# Altium PCB RGB_led_controller_v2.0.PcbDoc
Units mm, origin at the board's own origin, x right, y up, seen from the top; angles counter-clockwise.
Board outline 78 x 50 mm, 2 copper layers (Top Layer, Bottom Layer), stack 1.5 mm thick; 20 components, 17 nets, 95 pads, 39 vias.
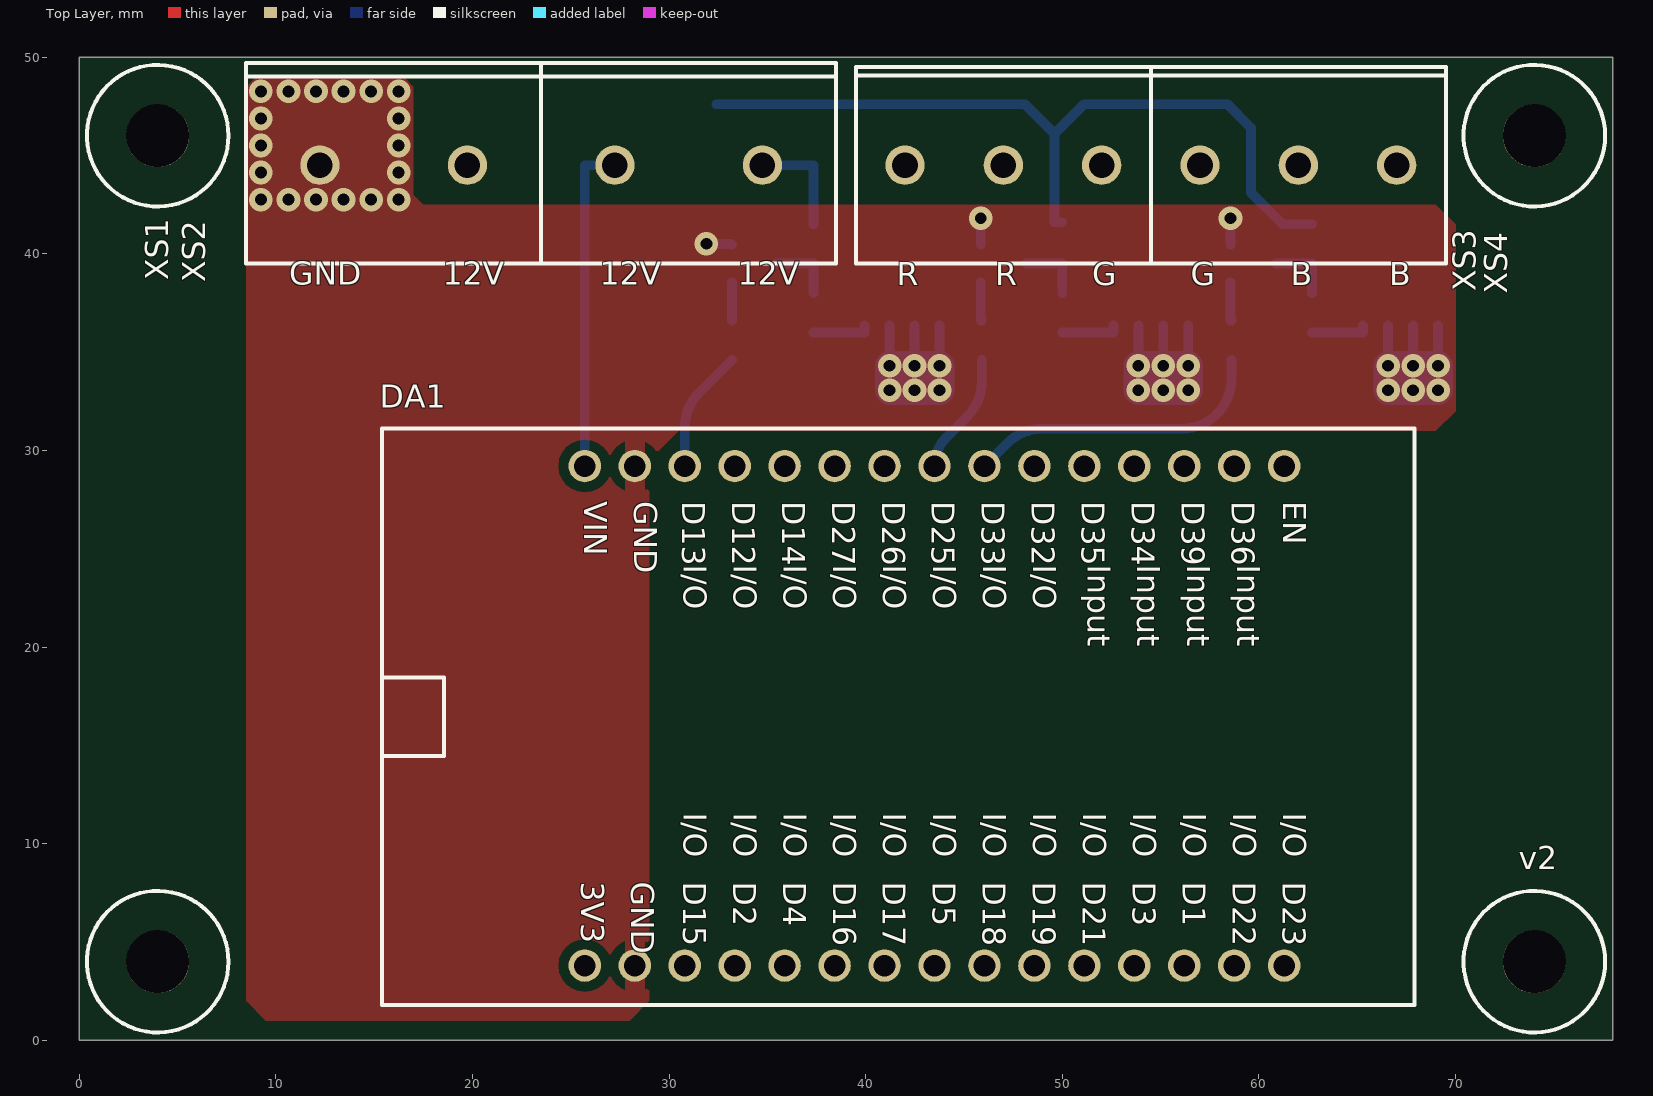
[diagram p0: Top Layer view]
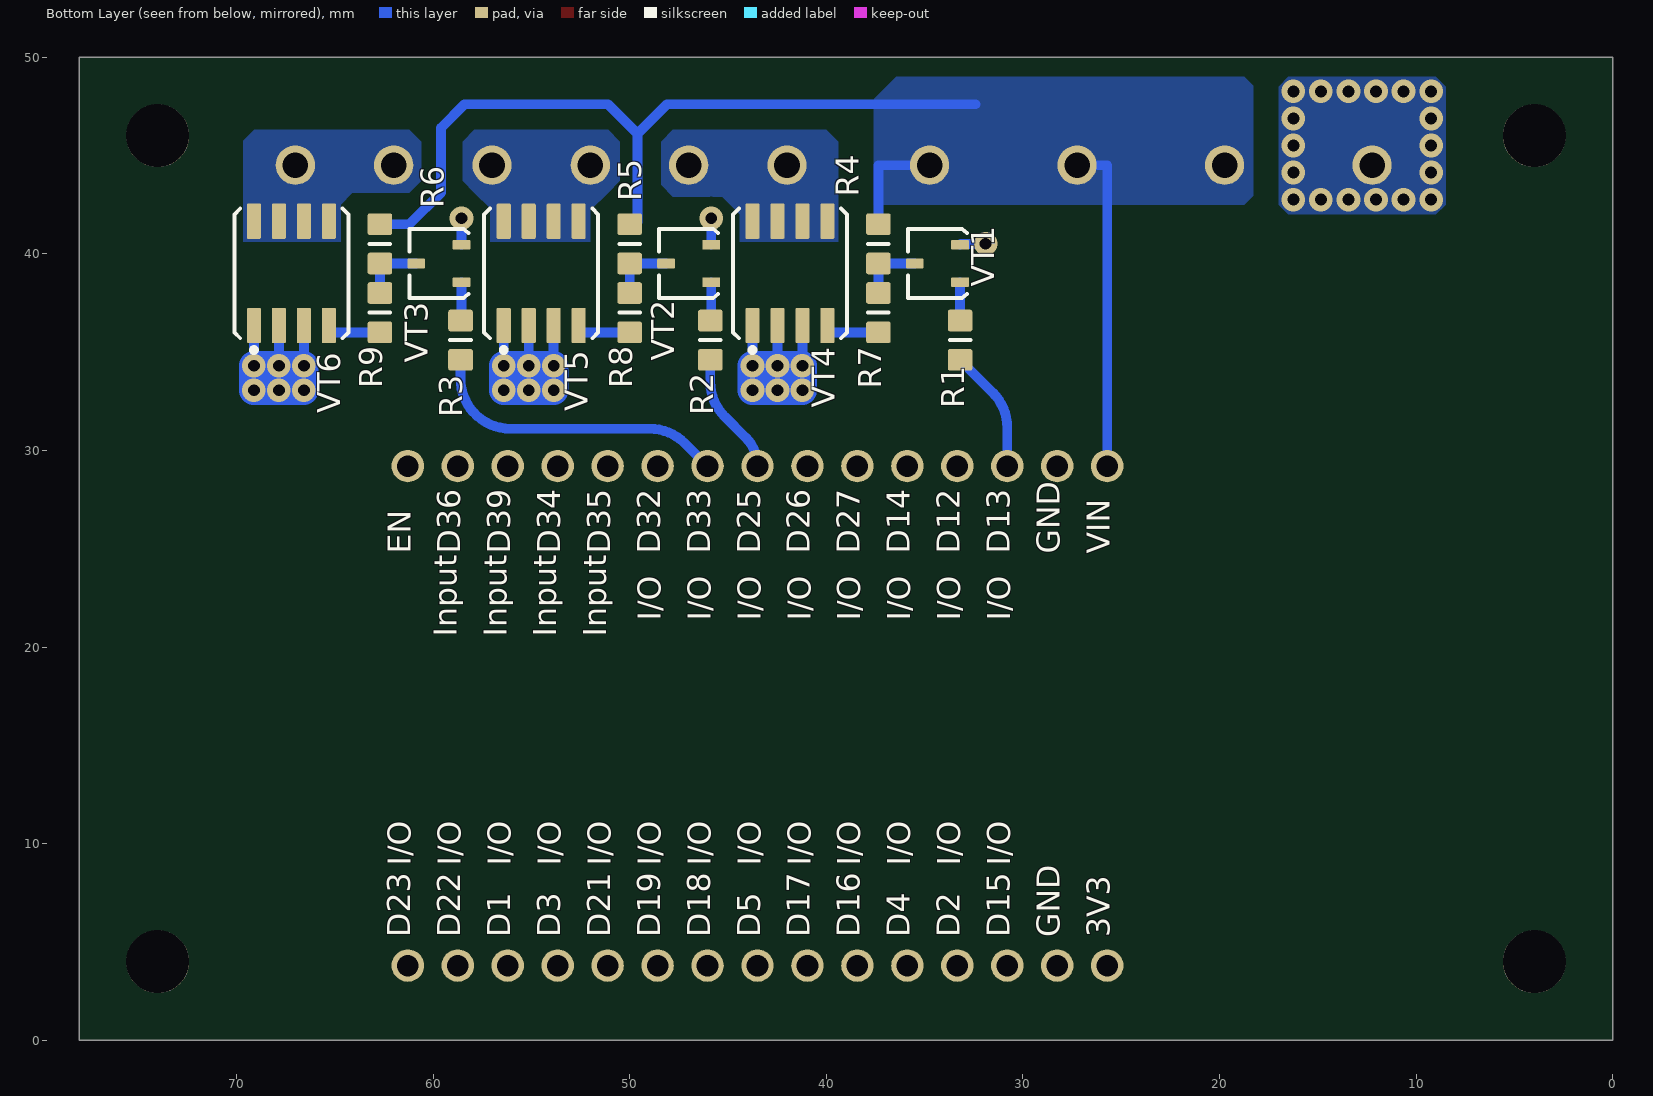
[diagram p1: Bottom Layer view, seen from below]
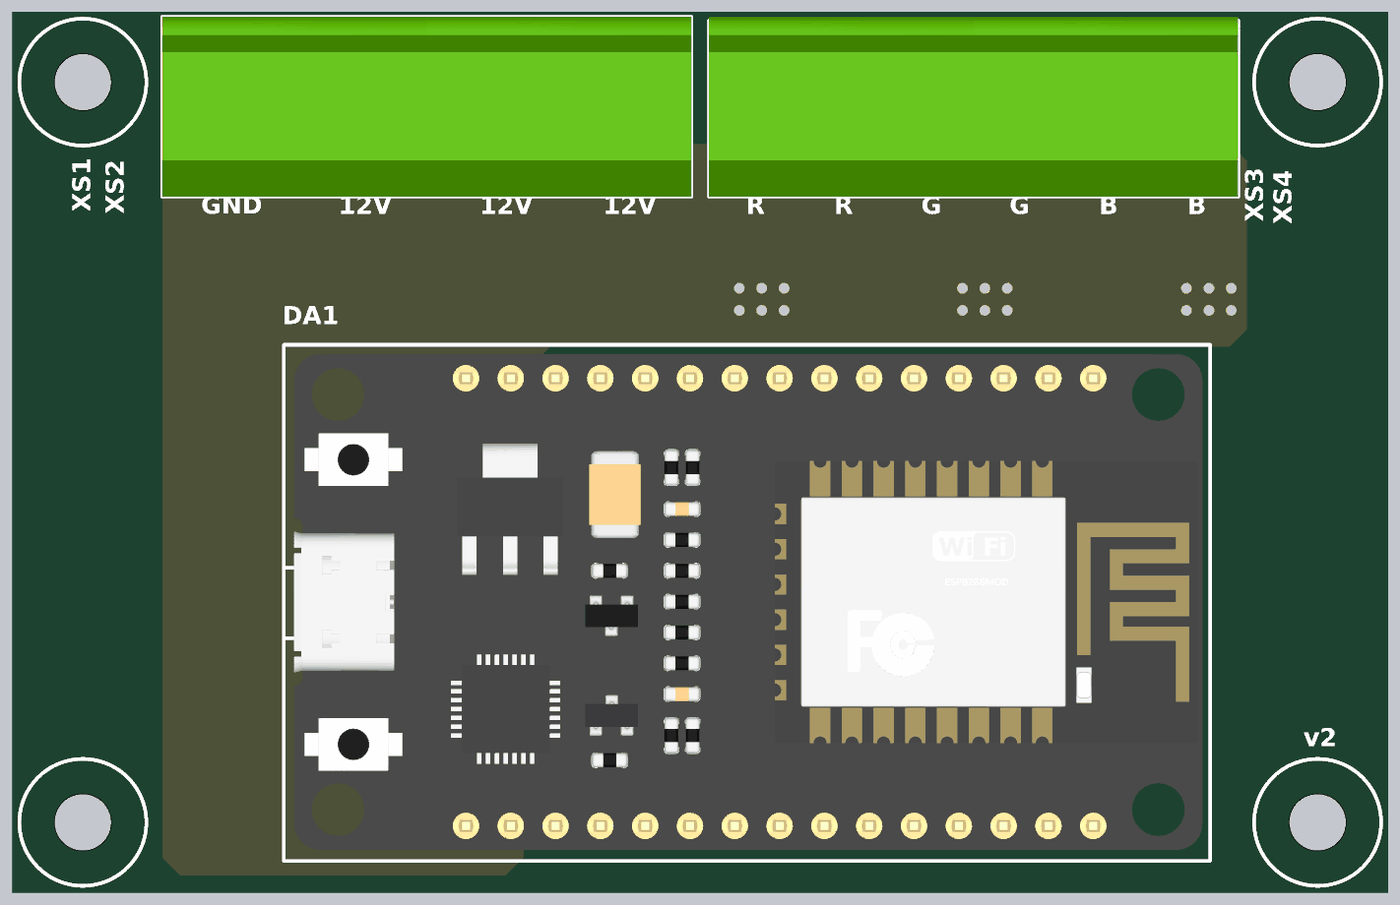
[diagram p2: 3D render of the assembled board from above, using the file's embedded part models]
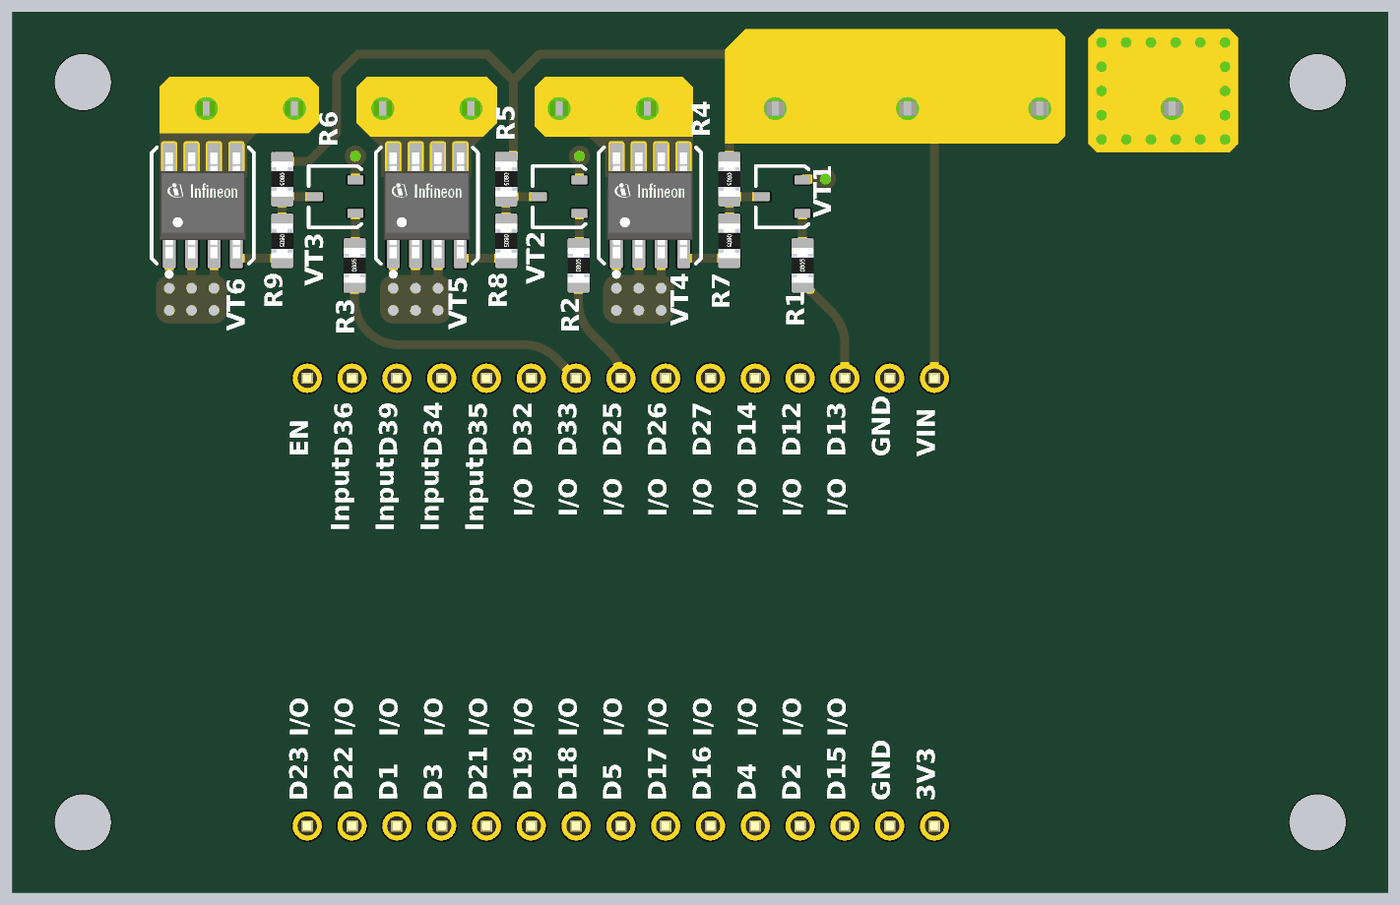
[diagram p3: 3D render of the assembled board from below, using the file's embedded part models]

## Layer stack, top to bottom
Top Solder: solder mask 0.025, Solder Resist, Dk 3.5
Top Layer: signal copper 0.018
Dielectric 3: core 1.464, FR4 Tg150, Dk 4.6
Bottom Layer: signal copper 0.018
Bottom Solder: solder mask 0.025, Solder Resist, Dk 3.5

## Board outline
0,0 78,0 78,50 0,50

## Design rules (kind name [scope] priority, off if disabled: settings)
BoardOutlineClearance [All] p1: gap=0.2 ignorepadtopadclearanceinfootprint=FALSE
Clearance [All] p1: gap=0.5 ignorepadtopadclearanceinfootprint=FALSE
ComponentClearance [All] p1: gap=0.1 collisioncheckmode=3 verticalgap=0.1 showdistances=FALSE
DiffPairsRouting [All] p1: maxlimit=2 minlimit=0.12 mostfreqgap=0.125 toplayer_mingap=0.125 toplayer_minwidth=0.138 toplayer_maxwidth=0.138 toplayer_prefwidth=0.138 bottomlayer_prefgap=0.12 bottomlayer_minwidth=0.15 bottomlayer_maxwidth=0.15 bottomlayer_prefwidth=0.15 maxuncoupledlength=10
HoleSize [All] p1: absolutevalues=TRUE maxlimit=3.2 minlimit=0.15 maxpercent=80.000 minpercent=20.000
HoleToHoleClearance [All] p1: gap=0.25 allowstackedmicrovias=TRUE
MinimumSolderMaskSliver [All] p1: minsoldermaskwidth=0.1
PlaneClearance PlaneClearance_shield [InNet('SHIELD')] p1: clearance=2
PlaneClearance PlaneClearance_krep [(ObjectKind = 'Pad') And (HoleDiameter > AsMM(3))] p2: clearance=1
PlaneClearance PlaneClearance_0.2_more [HoleDiameter > 0.2] p3: clearance=0.25
PlaneClearance PlaneClearance_0.2 [All] p4: clearance=0.2
PlaneConnect [All] p1: planeconnectstyle=Direct reliefexpansion=0.508 reliefentries=4 reliefconductorwidth=0.254 reliefairgap=0.254
PolygonConnect PolyConn[*_L01_*][*_Lxx_*].1 [(ObjectKind = 'Poly') And ((Name Like '*_L01_*') OR (Name Like '*_L02_*')) vs HasFootprint('*ESP32*')] p1: connectstyle=Relief reliefconductorwidth=1 reliefentries=4 polygonreliefangle="90 Angle" airgapwidth=0.5
PolygonConnect PolygonConnect_direct [All] p2: connectstyle=Direct reliefconductorwidth=0.254 reliefentries=4 polygonreliefangle="90 Angle" airgapwidth=0.254
RoutingVias [All] p1: holewidth=0.6 width=1.2 viastyle="Through Hole" minholewidth=0.6 minwidth=1.2 maxholewidth=0.6 maxwidth=1.2 useviatemplates=TRUE viatemplateguid#1={39882DA7-6BC9-438A-9936-38CDA30C47C4} viatemplatename#1=v120h60m0mx0
SilkToSilkClearance [All] p1: silktosilkclearance=0.1
SilkToSolderMaskClearance [IsPad] p1: minsilkscreentomaskgap=0.1 clearancetoexposedcopper=TRUE
SolderMaskExpansion [All] p1: expansion=0.05 istentingtop=FALSE
UnRoutedNet [All] p1: checkbadconnections=TRUE
Width [All] p1: maxlimit=5 minlimit=0.5 preferedwidth=0.5
20 further rules are at their usual default settings.

## Classes and differential pairs
net class POWER: 12V GND

## Components (designator, comment, footprint, x,y, rotation, side; value= is the part's Value field where it differs from the comment)
DA1 "ESP32-WROOM-DEVKIT-30pinArduino" ESP32-WROOM-DEVKIT-30PIN 43.5,16.5 r0 top locked
R1 "0805 1 кОм 5%" Chip_Resistor_0805 33.2,35.6 r90 bottom
R2 "0805 1 кОм 5%" Chip_Resistor_0805 45.9,35.6 r90 bottom
R3 "0805 1 кОм 5%" Chip_Resistor_0805 58.6,35.6 r90 bottom
R4 "0805 10 кОм 5%" Chip_Resistor_0805 37.35,40.5 r270 bottom
R5 "0805 10 кОм 5%" Chip_Resistor_0805 50,40.5 r270 bottom
R6 "0805 10 кОм 5%" Chip_Resistor_0805 62.7,40.5 r270 bottom
R7 "0805 100 Ом 5%" Chip_Resistor_0805 37.35,37 r270 bottom
R8 "0805 100 Ом 5%" Chip_Resistor_0805 50,37 r270 bottom
R9 "0805 100 Ом 5%" Chip_Resistor_0805 62.7,37 r270 bottom
VT1 "2Т3130А9/ПК" 2Т3130_(КТ-46) 34.35,39.5 r270 bottom
VT2 "2Т3130А9/ПК" 2Т3130_(КТ-46) 47,39.5 r270 bottom
VT3 "2Т3130А9/ПК" 2Т3130_(КТ-46) 59.7,39.5 r270 bottom
VT4 "IRF8707" IRF8707_SO8 41.85,39 r90 bottom
VT5 "IRF8707" IRF8707_SO8 54.5,39 r90 bottom
VT6 "IRF8707" IRF8707_SO8 67.2,39 r90 bottom
XS1 "KLS2-128-7.50-02P-4S" KLS2-128-7.50-02P-4S 16,44.5 r180 top locked
XS2 "KLS2-128-7.50-02P-4S" KLS2-128-7.50-02P-4S 31,44.5 r180 top locked
XS3 "KLS2-128I-5.00-03P-4S" KLS2-128I-5.00-03P-4S 47,44.5 r180 top locked
XS4 "KLS2-128I-5.00-03P-4S" KLS2-128I-5.00-03P-4S 62,44.5 r180 top locked

## Footprints (in the part's own frame and the unit in brackets; to place one, negate y for a bottom-side part, rotate by r counter-clockwise, add the part's x,y. Pads: shape width x height; smd on the part's side, far side on the other; paste and mask are expansions set on the pad)
2Т3130_(КТ-46) [mm] "Пластмассовый корпус КТ-46, 3.0x1.4mm"
  rrect20% 0.5x0.9 smd mask+0.1: 1(0.95,1.15) 2(-0.95,1.15) 3(0,-1.15)
  silkscreen extent -1.75,-1.5 1.75,1.5, body extent -1.5,-1.32 1.5,1.32, height 1.2
Chip_Resistor_0805 [mm] "Chip Resistor size 0805"
  rrect20% 1.1x1.25 smd mask+0.05: 1(-1,0) 2(1,0)
  silkscreen extent 0,-0.53 0,0.53, body extent -1,-0.63 1,0.63, height 0.6
ESP32-WROOM-DEVKIT-30PIN [mm] "7 leads, straight connector, socket header, 17.78x2.54 mm"
  round 1.65 hole 1.1 mask+0.1: 1(-17.78,12.7) 2(-15.24,12.7) 3(-12.7,12.7) 4(-10.16,12.7) 5(-7.62,12.7) 6(-5.08,12.7) 7(-2.54,12.7) 8(0,12.7) 9(2.54,12.7) 10(5.08,12.7) 11(7.62,12.7) 12(10.16,12.7) 13(12.7,12.7) 14(15.24,12.7) 15(17.78,12.7) 16(-17.78,-12.7) 17(-15.24,-12.7) 18(-12.7,-12.7) 19(-10.16,-12.7) 20(-7.62,-12.7) 21(-5.08,-12.7) 22(-2.54,-12.7) 23(0,-12.7) 24(2.54,-12.7) 25(5.08,-12.7) 26(7.62,-12.7) 27(10.16,-12.7) 28(12.7,-12.7) 29(15.24,-12.7) 30(17.78,-12.7)
  silkscreen extent -28.1,-14.7 24.4,14.6, body extent -27.53,-14.07 23.97,14.08, height 9.47
IRF8707_SO8 [mm] "8 pin, small outline integrated circuit (SOIC), 4.90x3.90 mm"
  rrect20% 1.8x0.72 smd mask+0.1: 1(-2.65,1.905) 2(-2.65,0.635) 3(-2.65,-0.635) 4(-2.65,-1.905) 5(2.65,-1.905) 6(2.65,-0.635) 7(2.65,0.635) 8(2.65,1.905)
  silkscreen extent -4.02,-2.9 3.3,2.9, body extent -3,-2.45 3,2.45, height 1.76
KLS2-128-7.50-02P-4S [mm] "KLS2-128-7.50-02P-4S"
  round 2 hole 1.3: 1(-3.75,0) 2(3.75,0)
  silkscreen extent -7.5,-5.2 7.5,5, body extent -7.5,-5.2 7.5,5, height 12.4
KLS2-128I-5.00-03P-4S [mm]
  round 2 hole 1.3: 1(-5,0) 2(0,0) 3(5,0)
  silkscreen extent -7.5,-5 7.5,5, body extent -7.5,-5.2 7.5,5, height 12.4

## Part data
DA1: library part ESP32-WROOM-DEVKIT-30pin
R1 R2 R3: library part 51, "Резистор 0805", Part Number=ERJ-6GEYJ102V, Для списка Part Number="Резистор ERJ-6GEYJ102V", Autor="Смирнов К.О.", Date=02.09.2014, Design Item ID=51, Tmax=155, Tmin=-55, Для списка номинал="Резистор 0805 1 кОм 5%", Мanufacturer=Panasonic, Мощность (Вт)=0,125, Ом=1000, Отечественный аналог="Р1-8В-0,125-1 кОм±5%-М-А-М", Отклонение=5%, Сопротивление="1 кОм", Сопротивление (для схемы)="1 к", СП ПЭ=ERJ-6GEYJ102V, Страна=Япония, Тип резистора=0805
R4 R5 R6: library part 75, "Резистор 0805", Part Number=ERJ-6GEYJ103V, Для списка Part Number="Резистор ERJ-6GEYJ103V", Autor="Смирнов К.О.", Date=02.09.2014, Design Item ID=75, Tmax=155, Tmin=-55, Для списка номинал="Резистор 0805 10 кОм 5%", Мanufacturer=Panasonic, Мощность (Вт)=0,125, Ом=10000, Отечественный аналог="Р1-8В-0,125-10 кОм±5%-М-А-М", Отклонение=5%, Сопротивление="10 кОм", Сопротивление (для схемы)="10 к", СП ПЭ=ERJ-6GEYJ103V, Страна=Япония, Тип резистора=0805
R7 R8 R9: library part 27, "Резистор 0805", Part Number=ERJ-6GEYJ101V, Для списка Part Number="Резистор ERJ-6GEYJ101V", Autor="Смирнов К.О.", Date=02.09.2014, Design Item ID=27, Tmax=155, Tmin=-55, Для списка номинал="Резистор 0805 100 Ом 5%", Мanufacturer=Panasonic, Мощность (Вт)=0,125, Ом=100, Отечественный аналог="Р1-8В-0,125-100 Ом±5%-Т-А-М", Отклонение=5%, Сопротивление="100 Ом", Сопротивление (для схемы)=100, СП ПЭ=ERJ-6GEYJ101V, Страна=Япония, Тип резистора=0805
VT1 VT2 VT3: library part 6, "Кремниевый эпитаксиально-планарный n-p-n транзистор", Manufacturer="ООО \"АРСЕНАЛ \"КРЗПП\"", Для списка Part Number="Транзистор 2Т3130А9/ПК АЕЯР.432140.259ТУ", Autor=Смирнов, Date=14.10.2014, Design Item ID=6, Part Number=2Т3130А9/ПК, Tmax=85, Tmin=-60, Категория=Транзистор, Страна=Россия, ТУ=АЕЯР.432140.259ТУ

## Free pads (board coordinates)
  round 3.2 hole 3.2 unplated: 1(4,4) 1(4,46) 1(74,4) 1(74,46)

## Via types
v1: diameter 1.2, hole 0.6, Top Layer to Bottom Layer, tented both sides, 39 vias

## Nets (pads, with @x,y where several pads share a name; then routed paths per layer and width w, separated by ;. In a path a pad name is that pad's centre, name@x,y a point inside that pad or via, vN(x,y) a via of type N, cw(c..) or ccw(c..) an arc to the next point about the centre after c; other vN are vias at no path point)
12V: DA1.1 R4.1 R5.1 R6.1 XS1.1 XS2.1 XS2.2 | length 62.9
  Bottom Layer w0.5: DA1.1 25.72,44.5 XS2.2 ; 32.4,47.6 48.1,47.6 49.6,46.1 ; XS2.1@35.2,44.5 37.35,44.5 R4.1 ; R5.1@50,41.6 49.6,41.6 49.6,46.1 ; R6.1 61.2,41.5 59.6,43.1 59.6,46.4 58.4,47.6 51.1,47.6 49.6,46.1
B: VT6.5 VT6.6 VT6.7 VT6.8 XS4.1 XS4.2
CH_B: DA1.9 R3.1 | length 15.6
  Bottom Layer w0.5: DA1.9 47.196,30.356 cw(c48.992,28.56) 48.992,31.1 56.06,31.1 ccw(c56.06,33.64) 58.6,33.64 R3.1
CH_G: DA1.8 R2.1 | length 6.2
  Bottom Layer w0.5: DA1.8 cw(c45.552,29.2) 44.101,30.651 45.156,31.706 ccw(c43.36,33.502) 45.9,33.502 R2.1
CH_R: DA1.3 R1.1 | length 6.3
  Bottom Layer w0.5: DA1.3 30.8,31.148 cw(c33.34,31.148) 31.544,32.944 R1.1
G: VT5.5 VT5.6 VT5.7 VT5.8 XS3.1 XS4.3
GND: DA1.2 DA1.17 VT1.2 VT2.2 VT3.2 VT4.1 VT4.2 VT4.3 VT5.1 VT5.2 VT5.3 VT6.1 VT6.2 VT6.3 XS1.2 | length 45.2
  Bottom Layer w0.5: v1(31.9,40.5) 33.15,40.5 VT1.2 ; v1(41.215,34.305) VT4.3 ; v1(42.485,34.305) VT4.2 ; v1(43.755,34.305) VT4.1 ; VT2.2 v1(45.85,41.8) ; v1(53.865,34.305) VT5.3 ; v1(55.135,34.305) VT5.2 ; v1(56.405,34.305) VT5.1 ; VT3.2 v1(58.55,41.8) ; v1(66.565,34.305) VT6.3 ; v1(67.835,34.305) VT6.2 ; v1(69.105,34.305) VT6.1
  Bottom Layer w1.5: v1(41.215,33.05) v1(41.215,34.305) v1(42.485,34.305) v1(43.755,34.305) v1(43.755,33.05) v1(42.485,33.05) v1(41.215,33.05) ; v1(53.865,33.05) v1(55.135,33.05) v1(56.405,33.05) v1(56.405,34.305) v1(55.135,34.305) v1(53.865,34.305) v1(53.865,33.05) ; v1(66.565,33.05) v1(67.835,33.05) v1(69.105,33.05) v1(69.105,34.305) v1(67.835,34.305) v1(66.565,34.305) v1(66.565,33.05)
  other v1: 9.25,42.75 10.65,42.75 12.05,42.75 13.45,42.75 14.85,42.75 16.25,42.75 9.25,44.125 16.25,44.125 9.25,45.5 16.25,45.5 9.25,46.875 16.25,46.875 9.25,48.25 10.65,48.25 12.05,48.25 13.45,48.25 14.85,48.25 16.25,48.25
NetR1_2: R1.2 VT1.1 | length 1.9
  Bottom Layer w0.5: R1.2 VT1.1
NetR2_2: R2.2 VT2.1 | length 2
  Bottom Layer w0.5: VT2.1 45.85,36.6 R2.2
NetR3_2: R3.2 VT3.1 | length 2
  Bottom Layer w0.5: VT3.1 58.55,36.6 R3.2
NetR4_2: R4.2 R7.1 VT1.3 | length 3.3
  Bottom Layer w0.5: VT1.3 R4.2 R7.1
NetR5_2: R5.2 R8.1 VT2.3 | length 3.3
  Bottom Layer w0.5: VT2.3 R5.2 R8.1
NetR6_2: R6.2 R9.1 VT3.3 | length 3.3
  Bottom Layer w0.5: VT3.3 R6.2 R9.1
NetR7_2: R7.2 VT4.4 | length 2.9
  Bottom Layer w0.5: R7.2 39.945,36 VT4.4
NetR8_2: R8.2 VT5.4 | length 2.9
  Bottom Layer w0.5: R8.2 52.595,36 VT5.4
NetR9_2: R9.2 VT6.4 | length 2.9
  Bottom Layer w0.5: R9.2 65.295,36 VT6.4
R: VT4.5 VT4.6 VT4.7 VT4.8 XS3.2 XS3.3
pads on no net: DA1.4 DA1.5 DA1.6 DA1.7 DA1.10 DA1.11 DA1.12 DA1.13 DA1.14 DA1.15 DA1.16 DA1.18 DA1.19 DA1.20 DA1.21 DA1.22 DA1.23 DA1.24 DA1.25 DA1.26 DA1.27 DA1.28 DA1.29 DA1.30

## Polygon pours and split planes (outlines as drawn)
GND on Bottom Layer "NONET_L02_P-001" (solid, pour order 5): 9,49 8.5,48.5 8.5,42.5 9,42 16.5,42 17,42.5 17,48.5 16.5,49
12V on Bottom Layer "12V_L02_P003" (solid, pour order 3): 18.3,48.55 18.3,42.95 18.75,42.5 37.6,42.5 37.6,47.849 36.449,49 18.75,49
G on Bottom Layer "G_L02_P001" (solid, pour order 1): 50.5,45.7 50.5,43.7 51.1,43.1 52,42.2 52,40.6 57.1,40.6 57.1,42.3 57.9,43.1 58.5,43.7 58.5,45.7 57.9,46.3 51.1,46.3
R on Bottom Layer "R_L02_P000" (solid, pour order 0): 39.4,40.6 44.4,40.6 44.4,42 45.3,42.9 47.8,42.9 48.4,43.5 48.4,45.7 47.8,46.3 40,46.3 39.4,45.7
B on Bottom Layer "B_L02_P002" (solid, pour order 2): 60.6,45.7 60.6,43.7 61.2,43.1 64.1,43.1 64.7,42.5 64.7,40.6 69.65,40.6 69.65,45.75 69.1,46.3 61.2,46.3
GND on Top Layer "GND_L01_P004" (solid, pour order 4): 8.5,48.5 8.5,2 9.5,1 28,1 29,2 29,29.5 30.5,31 69,31 70,32 70,41.5 69,42.5 17.5,42.5 17,43 17,48.5 16.5,49 9,49

## Silkscreen, mask and mechanical layers (free items; w line width, h text height)
Top Overlay:
  circle w0.2: c74,4 r3.6
  circle w0.2: c74,46 r3.6
  circle w0.2: c4,46 r3.6
  circle w0.2: c4,4 r3.6
  text "GND" at 10.699,38.035 h2
  text "12V" at 18.491,38.033 h2
  text "12V" at 26.491,38.033 h2
  text "12V" at 33.491,38.033 h2
  text "R" at 41.589,38.024 h2
  text "R" at 46.589,38.024 h2
  text "G" at 51.526,38.024 h2
  text "G" at 56.526,38.024 h2
  text "B" at 61.614,38.017 h2
  text "B" at 66.614,38.017 h2
  text "v2" at 73.2,8.328 h2
Bottom Solder:
  region: 61.2,43.1 60.6,43.7 60.6,45.7 61.2,46.3 69.1,46.3 69.65,45.75 69.65,43.1
  region: 50.5,45.7 51.1,46.3 57.9,46.3 58.5,45.7 58.5,43.7 57.7,42.9 51.3,42.9 50.5,43.7
  region: 39.4,45.7 40,46.3 47.8,46.3 48.4,45.7 48.4,43.5 47.8,42.9 39.4,42.9
  region: 8.5,48.5 9,49 16.5,49 17,48.5 17,42.75 17,42.5 16.5,42 9,42 8.5,42.5
  region: 18.3,42.95 18.75,42.5 37.6,42.5 37.6,47.852 36.452,49 18.75,49 18.3,48.55
Board:
  the board outline again, w0.2

## Text inside footprints (layer, text, board x,y; h text height)
DA1: Top Overlay "GND" at 27.695,8.07 h2 r270; Top Overlay "3V3" at 25.161,8.07 h2 r270; Top Overlay "D23" at 60.82,8.07 h2 r270; Top Overlay "D22" at 58.28,8.07 h2 r270; Top Overlay "D21" at 50.659,8.07 h2 r270; Top Overlay "D19" at 48.119,8.07 h2 r270; Top Overlay "D17" at 40.499,8.07 h2 r270; Top Overlay "D16" at 37.959,8.07 h2 r270; Top Overlay "D15" at 30.339,8.07 h2 r270; Top Overlay "I/O" at 60.842,11.57 h2 r270; Top Overlay "I/O" at 58.302,11.57 h2 r270; Top Overlay "I/O" at 48.142,11.57 h2 r270; Top Overlay "I/O" at 50.682,11.57 h2 r270; Top Overlay "I/O" at 37.982,11.57 h2 r270; Top Overlay "I/O" at 40.522,11.57 h2 r270; Top Overlay "I/O" at 30.362,11.57 h2 r270; Top Overlay "D18" at 45.579,8.07 h2 r270; Top Overlay "D1" at 55.739,8.07 h2 r270; Top Overlay "I/O" at 55.762,11.57 h2 r270; Top Overlay "D3" at 53.2,8.07 h2 r270; Top Overlay "I/O" at 53.222,11.57 h2 r270; Top Overlay "I/O" at 45.602,11.57 h2 r270; Top Overlay "D5" at 43.04,8.07 h2 r270; Top Overlay "I/O" at 43.062,11.57 h2 r270; Top Overlay "D4" at 35.419,8.07 h2 r270; Top Overlay "I/O" at 35.442,11.57 h2 r270; Top Overlay "D2" at 32.88,8.07 h2 r270; Top Overlay "I/O" at 32.902,11.57 h2 r270; Top Overlay "EN" at 60.853,27.4 h2 r270; Top Overlay "D36" at 58.23,27.4 h2 r270; Top Overlay "D35" at 50.61,27.4 h2 r270; Top Overlay "D32" at 48.07,27.4 h2 r270; Top Overlay "D26" at 40.45,27.4 h2 r270; Top Overlay "D27" at 37.91,27.4 h2 r270; Top Overlay "D13" at 30.289,27.4 h2 r270; Top Overlay "GND" at 27.845,27.4 h2 r270; Top Overlay "D39" at 55.69,27.4 h2 r270; Top Overlay "D34" at 53.149,27.4 h2 r270; Top Overlay "D33" at 45.53,27.4 h2 r270; Top Overlay "D25" at 42.99,27.4 h2 r270; Top Overlay "D14" at 35.369,27.4 h2 r270; Top Overlay "D12" at 32.829,27.4 h2 r270; Top Overlay "VIN" at 25.305,27.4 h2 r270; Top Overlay "Input" at 58.521,24.17 h2 r270; Top Overlay "Input" at 50.901,24.17 h2 r270; Top Overlay "I/O" at 48.142,24.17 h2 r270; Top Overlay "I/O" at 37.982,24.17 h2 r270; Top Overlay "I/O" at 40.522,24.17 h2 r270; Top Overlay "I/O" at 30.362,24.17 h2 r270; Top Overlay "Input" at 55.981,24.17 h2 r270; Top Overlay "Input" at 53.441,24.17 h2 r270; Top Overlay "I/O" at 45.602,24.17 h2 r270; Top Overlay "I/O" at 43.062,24.17 h2 r270; Top Overlay "I/O" at 35.442,24.17 h2 r270; Top Overlay "I/O" at 32.902,24.17 h2 r270; Bottom Overlay "GND" at 27.745,5.23 h2 r270; Bottom Overlay "3V3" at 25.211,5.23 h2 r270; Bottom Overlay "EN" at 60.753,24.75 h2 r270; Bottom Overlay "D36" at 58.23,24.75 h2 r270; Bottom Overlay "D35" at 50.61,24.75 h2 r270; Bottom Overlay "D32" at 48.07,24.75 h2 r270; Bottom Overlay "D26" at 40.45,24.75 h2 r270; Bottom Overlay "D27" at 37.91,24.75 h2 r270; Bottom Overlay "D13" at 30.289,24.75 h2 r270; Bottom Overlay "GND" at 27.745,24.75 h2 r270; Bottom Overlay "D39" at 55.69,24.75 h2 r270; Bottom Overlay "D34" at 53.149,24.75 h2 r270; Bottom Overlay "D33" at 45.53,24.75 h2 r270; Bottom Overlay "D25" at 42.99,24.75 h2 r270; Bottom Overlay "D14" at 35.369,24.75 h2 r270; Bottom Overlay "D12" at 32.829,24.75 h2 r270; Bottom Overlay "VIN" at 25.205,24.75 h2 r270; Bottom Overlay "Input" at 58.421,20.53 h2 r270; Bottom Overlay "Input" at 50.801,20.53 h2 r270; Bottom Overlay "I/O" at 48.042,21.33 h2 r270; Bottom Overlay "I/O" at 37.882,21.33 h2 r270; Bottom Overlay "I/O" at 40.422,21.33 h2 r270; Bottom Overlay "I/O" at 30.262,21.33 h2 r270; Bottom Overlay "Input" at 55.881,20.53 h2 r270; Bottom Overlay "Input" at 53.341,20.53 h2 r270; Bottom Overlay "I/O" at 45.502,21.33 h2 r270; Bottom Overlay "I/O" at 42.962,21.33 h2 r270; Bottom Overlay "I/O" at 35.342,21.33 h2 r270; Bottom Overlay "I/O" at 32.802,21.33 h2 r270; Bottom Overlay "D23" at 60.77,5.23 h2 r270; Bottom Overlay "D22" at 58.23,5.23 h2 r270; Bottom Overlay "D21" at 50.609,5.23 h2 r270; Bottom Overlay "D19" at 48.069,5.23 h2 r270; Bottom Overlay "D17" at 40.449,5.23 h2 r270; Bottom Overlay "D16" at 37.909,5.23 h2 r270; Bottom Overlay "D15" at 30.289,5.23 h2 r270; Bottom Overlay "I/O" at 60.742,8.88 h2 r270; Bottom Overlay "I/O" at 58.202,8.88 h2 r270; Bottom Overlay "I/O" at 48.042,8.88 h2 r270; Bottom Overlay "I/O" at 50.582,8.88 h2 r270; Bottom Overlay "I/O" at 37.882,8.88 h2 r270; Bottom Overlay "I/O" at 40.422,8.88 h2 r270; Bottom Overlay "I/O" at 30.262,8.88 h2 r270; Bottom Overlay "D18" at 45.529,5.23 h2 r270; Bottom Overlay "D1" at 55.689,5.23 h2 r270; Bottom Overlay "I/O" at 55.662,8.88 h2 r270; Bottom Overlay "D3" at 53.15,5.23 h2 r270; Bottom Overlay "I/O" at 53.122,8.88 h2 r270; Bottom Overlay "I/O" at 45.502,8.88 h2 r270; Bottom Overlay "D5" at 42.99,5.23 h2 r270; Bottom Overlay "I/O" at 42.962,8.88 h2 r270; Bottom Overlay "D4" at 35.369,5.23 h2 r270; Bottom Overlay "I/O" at 35.342,8.88 h2 r270; Bottom Overlay "D2" at 32.83,5.23 h2 r270; Bottom Overlay "I/O" at 32.802,8.88 h2 r270